# Altium PCB ESP32PCBc[1].PcbDoc (part 2 of 3)
Units mil, origin at the board's own origin, x right, y up, seen from the top; angles counter-clockwise.
Board outline 5118.11 x 3346.46 mil, 4 copper layers (L1, L2, L3, L4), stack 61.583 mil thick; 55 components, 53 nets, 223 pads, 182 vias.
Unrouted connection lines stored in the file: 1.
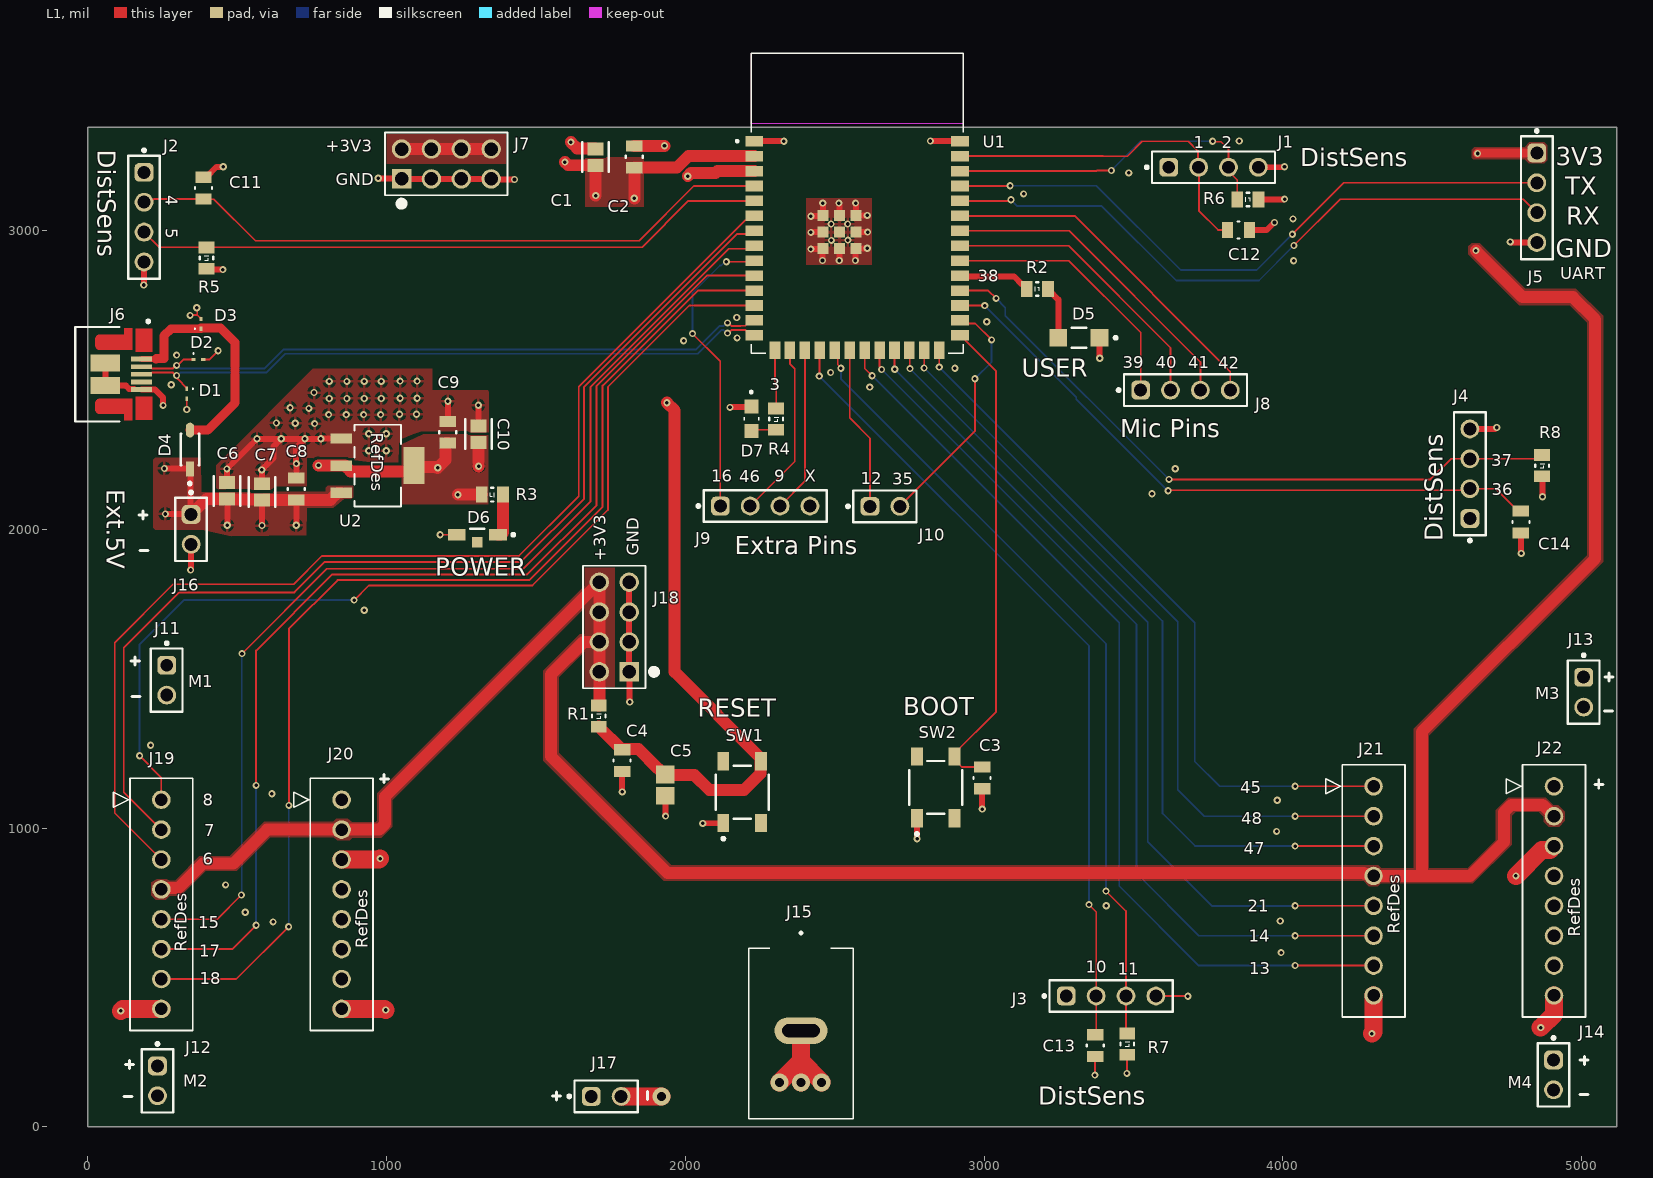
[diagram p0: L1 view]

## Part data (continued)
D4: library part 1N5819HW-7-F, "1N5819HW Series 40 V 1 A Surface Mount Schottky Barrier Rectifier - SOD-123", Average Rectified Current=1A, Case/Package=SOD-123-2, Forward Voltage=750mV, Manufacturer="Diodes Inc.", Max Forward Surge Current (Ifsm)=25A, Max Junction Temperature (Tj)=125°C, Max Power Dissipation=450mW, Max Repetitive Reverse Voltage (Vrrm)=40V, Min Operating Temperature=-65°C, Peak Reverse Current=1mA, Supplier Part Number=1N5819HW-FDIDKR-ND, Category="Schottky Diodes", China RoHS=Compliant, ComponentLink1Description=https://datasheet.octopart.com:443/1N5819HW-7-F-Diodes-Inc.-datasheet-180549196.pdf?src-supplier=IHS, ComponentLink1URL=https://datasheet.octopart.com:443/1N5819HW-7-F-Diodes-Inc.-datasheet-180549196.pdf?src-supplier=IHS, ComponentLink2Description=https://datasheet.octopart.com:443/1N5819HW-7-F-Diodes-Inc.-datasheet-8332965.pdf?src-supplier=Upverter, ComponentLink2URL=https://datasheet.octopart.com:443/1N5819HW-7-F-Diodes-Inc.-datasheet-8332965.pdf?src-supplier=Upverter, ComponentLink3Description=https://sigma.octopart.com:443/138895985/technical_drawing/Diodes-Inc.-1N5819HW-7-F.pdf?src-supplier=Upverter, ComponentLink3URL=https://sigma.octopart.com:443/138895985/technical_drawing/Diodes-Inc.-1N5819HW-7-F.pdf?src-supplier=Upverter, ComponentLink4Description=https://datasheet.octopart.com:443/1N5819HW-7-F-Diodes-Inc.-datasheet-134530231.pdf?src-supplier=Future+Electronics, ComponentLink4URL=https://datasheet.octopart.com:443/1N5819HW-7-F-Diodes-Inc.-datasheet-134530231.pdf?src-supplier=Future+Electronics, ComponentLink5Description=https://datasheet.octopart.com:443/1N5819HW-7-F-Diodes-Inc.-datasheet-34441420.pdf?src-supplier=Future+Electronics, ComponentLink5URL=https://datasheet.octopart.com:443/1N5819HW-7-F-Diodes-Inc.-datasheet-34441420.pdf?src-supplier=Future+Electronics, ComponentLink6Description=https://datasheet.octopart.com:443/1N5819HW-7-F-Diodes-Inc.-datasheet-10497210.pdf?src-supplier=Future+Electronics, ComponentLink6URL=https://datasheet.octopart.com:443/1N5819HW-7-F-Diodes-Inc.-datasheet-10497210.pdf?src-supplier=Future+Electronics, ComponentLink7Description=https://datasheet.octopart.com:443/1N5819HW-7-F-Diodes-Inc.-datasheet-169364014.pdf?src-supplier=Newark, ComponentLink7URL=https://datasheet.octopart.com:443/1N5819HW-7-F-Diodes-Inc.-datasheet-169364014.pdf?src-supplier=Newark, ComponentLink8Description=https://datasheet.octopart.com:443/1N5819HW-7-F-Diodes-Inc.-datasheet-78715396.pdf?src-supplier=Newark, ComponentLink8URL=https://datasheet.octopart.com:443/1N5819HW-7-F-Diodes-Inc.-datasheet-78715396.pdf?src-supplier=Newark, ComponentLink9Description=https://datasheet.octopart.com:443/1N5819HW-7-F-Diodes-Inc.-datasheet-14053419.pdf?src-supplier=iiiC, ComponentLink9URL=https://datasheet.octopart.com:443/1N5819HW-7-F-Diodes-Inc.-datasheet-14053419.pdf?src-supplier=iiiC, ComponentLink10Description=https://datasheet.octopart.com:443/1N5819HW-7-F-Diodes-Inc.-datasheet-7274306.pdf?src-supplier=Jameco, ComponentLink10URL=https://datasheet.octopart.com:443/1N5819HW-7-F-Diodes-Inc.-datasheet-7274306.pdf?src-supplier=Jameco, ComponentLink11Description=https://datasheet.octopart.com:443/1N5819HW-7-F-Diodes-Inc.-datasheet-16627.pdf?src-supplier=Mouser, ComponentLink11URL=https://datasheet.octopart.com:443/1N5819HW-7-F-Diodes-Inc.-datasheet-16627.pdf?src-supplier=Mouser, ComponentLink12Description=https://datasheet.octopart.com:443/1N5819HW-7-F-Diodes-Inc.-datasheet-145195.pdf?src-supplier=DigiKey, ComponentLink12URL=https://datasheet.octopart.com:443/1N5819HW-7-F-Diodes-Inc.-datasheet-145195.pdf?src-supplier=DigiKey, ComponentLink13Description=http://sigma.octopart.com:80/15616867/materials_sheet/Diodes-Inc.-1N5819HW-7-F.pdf?src-supplier=Compliance+Statements, ComponentLink13URL=http://sigma.octopart.com:80/15616867/materials_sheet/Diodes-Inc.-1N5819HW-7-F.pdf?src-supplier=Compliance+Statements, Contact Plating=Tin, Current Rating=1A, Element Configuration=Single, Forward Current=1A, Height=1.45mm, Lead Free="Lead Free", Length=2.85mm, Lifecycle Status=Production, Manufacturer Part Number=1N5819HW-7-F, Max Operating Temperature=125°C, Max Output current=1A, Max Reverse Voltage (DC)=40V, Min Breakdown Voltage=40V, Number of Elements=1, Number of Terminals=2, Output Current=1A, Packaging="Tape and Reel", Peak Non-Repetitive Surge Current=25A, Pins=2, Polarity=Standard, Pricing="1=0.29, 10=0.166, 100=0.1036, 500=0.07624, 1000=0.06736 (USD)", Radiation Hardening=No, REACH SVHC=Yes, Reverse Standoff Voltage=40V, Reverse Voltage=40V, RoHS=Compliant, Schedule B="8541100080, 8541100080|8541100080|8541100080|8541100080|8541100080", Stock=229353, Supplier=DigiKey, Termination=SMD/SMT, Voltage Rating (DC)=40V, Weight=10.007382mg, Width=1.7mm
D5: library part HSMS-C150, "LED Uni-Color Hi-Eff. Red 630nm 2-Pin Chip LED T/R / LED RED DIFFUSED 1206 SMD", Case Code (Imperial)=1206, Case Code (Metric)=3216, Color=Orange, Forward Current=25mA, Forward Voltage=2.6V, Illumination Color=Red, Lens Color="Clear, White", Manufacturer=Avago, Max Junction Temperature (Tj)=95°C, Max Operating Temperature=85°C, Min Operating Temperature=-40°C, Power Dissipation=65mW, Reverse Voltage=5V, Supplier Part Number=516-1440-1-ND, Test Current=20mA, Case/Package=1206, Category=LEDs, China RoHS=Compliant, ComponentLink1Description=https://datasheet.octopart.com:443/HSMS-C150-Broadcom-datasheet-11546876.pdf?src-supplier=Farnell, ComponentLink1URL=https://datasheet.octopart.com:443/HSMS-C150-Broadcom-datasheet-11546876.pdf?src-supplier=Farnell, ComponentLink2Description=https://datasheet.octopart.com:443/HSMS-C150.-Avago-datasheet-505973.pdf?src-supplier=Farnell, ComponentLink2URL=https://datasheet.octopart.com:443/HSMS-C150.-Avago-datasheet-505973.pdf?src-supplier=Farnell, ComponentLink3Description=https://datasheet.octopart.com:443/HSMS-C150.-Avago-datasheet-500352.pdf?src-supplier=Farnell, ComponentLink3URL=https://datasheet.octopart.com:443/HSMS-C150.-Avago-datasheet-500352.pdf?src-supplier=Farnell, ComponentLink4Description=https://datasheet.octopart.com:443/HSMS-C150-Broadcom-datasheet-179995514.pdf?src-supplier=IHS, ComponentLink4URL=https://datasheet.octopart.com:443/HSMS-C150-Broadcom-datasheet-179995514.pdf?src-supplier=IHS, ComponentLink5Description=https://datasheet.octopart.com:443/HSMS-C150-Avago-datasheet-10307877.pdf?src-supplier=Newark, ComponentLink5URL=https://datasheet.octopart.com:443/HSMS-C150-Avago-datasheet-10307877.pdf?src-supplier=Newark, ComponentLink6Description=https://datasheet.octopart.com:443/HSMS-C150-Avago-datasheet-14175028.pdf?src-supplier=iiiC, ComponentLink6URL=https://datasheet.octopart.com:443/HSMS-C150-Avago-datasheet-14175028.pdf?src-supplier=iiiC, ComponentLink7Description=https://datasheet.octopart.com:443/HSMS-C150-Avago-datasheet-7559354.pdf?src-supplier=Future+Electronics, ComponentLink7URL=https://datasheet.octopart.com:443/HSMS-C150-Avago-datasheet-7559354.pdf?src-supplier=Future+Electronics, ComponentLink8Description=https://datasheet.octopart.com:443/HSMS-C150-Avago-datasheet-7278276.pdf?src-supplier=Jameco, ComponentLink8URL=https://datasheet.octopart.com:443/HSMS-C150-Avago-datasheet-7278276.pdf?src-supplier=Jameco, ComponentLink9Description=https://datasheet.octopart.com:443/HSMS-C150-Avago-datasheet-9899724.pdf?src-supplier=RS+(Formerly+Allied+Electronics), ComponentLink9URL=https://datasheet.octopart.com:443/HSMS-C150-Avago-datasheet-9899724.pdf?src-supplier=RS+(Formerly+Allied+Electronics), ComponentLink10Description=https://datasheet.octopart.com:443/HSMS-C150-Avago-datasheet-8432.pdf?src-supplier=DigiKey, ComponentLink10URL=https://datasheet.octopart.com:443/HSMS-C150-Avago-datasheet-8432.pdf?src-supplier=DigiKey, Depth=1.6mm, Dominant Wavelength=626nm, Height=1.1mm, Lead Free="Lead Free", Length=3.2mm, Lens Style=Diffused, Lens Transparency=Diffused, Lifecycle Status=Production, Luminous Intensity=2.8mcd, Manufacturer Part Number=HSMS-C150, Mounting Technology="Surface Mount", Number of Circuits=1, Number of Elements=1, Number of LEDs=1, Number of Terminals=2, Packaging="Cut Tape", Peak Wavelength=630nm, Pins=2, Power Rating=65mW, Pricing="1=0.29, 10=0.201, 100=0.1412, 500=0.11414, 1000=0.10521 (USD)", Radiation Hardening=No, REACH SVHC=Yes, RoHS=Compliant, Schedule B=8541402000|8541402000|8541402000|8541402000|8541402000, Shape=Rectangular, Stock=85183, Supplier=DigiKey, Terminal Pitch=2.7mm, Viewing Angle=170°, Wavelength=626nm, Width=1.6mm
D6: library part HSMG-C110, "Surface Mount ChipLED Single Color LED, Green, Clear Untinted Nondiffused", Case/Package=SMD/SMT, Color=Green, Forward Current=25mA, Forward Voltage=2.6V, Lens Color="Clear, White", Manufacturer=Avago, Max Operating Temperature=85°C, Max Power Dissipation=78mW, Min Operating Temperature=-40°C, Power Rating=65mW, Reverse Voltage=5V, Supplier Part Number=516-1452-1-ND, Test Current=20mA, Voltage Rating (DC)=2.2V, Category=LEDs, China RoHS=Compliant, ComponentLink1Description=https://datasheet.octopart.com:443/HSMG-C110-Broadcom-datasheet-11546876.pdf?src-supplier=Avago, ComponentLink1URL=https://datasheet.octopart.com:443/HSMG-C110-Broadcom-datasheet-11546876.pdf?src-supplier=Avago, ComponentLink2Description=https://datasheet.octopart.com:443/HSMG-C110-Broadcom-datasheet-179995514.pdf?src-supplier=IHS, ComponentLink2URL=https://datasheet.octopart.com:443/HSMG-C110-Broadcom-datasheet-179995514.pdf?src-supplier=IHS, ComponentLink3Description=https://datasheet.octopart.com:443/HSMG-C110-Avago-datasheet-10307877.pdf?src-supplier=Newark, ComponentLink3URL=https://datasheet.octopart.com:443/HSMG-C110-Avago-datasheet-10307877.pdf?src-supplier=Newark, ComponentLink4Description=https://datasheet.octopart.com:443/HSMG-C110-Broadcom-datasheet-26698224.pdf?src-supplier=Newark, ComponentLink4URL=https://datasheet.octopart.com:443/HSMG-C110-Broadcom-datasheet-26698224.pdf?src-supplier=Newark, ComponentLink5Description=https://datasheet.octopart.com:443/HSMG-C110-Avago-datasheet-8329607.pdf?src-supplier=Future+Electronics, ComponentLink5URL=https://datasheet.octopart.com:443/HSMG-C110-Avago-datasheet-8329607.pdf?src-supplier=Future+Electronics, ComponentLink6Description=https://datasheet.octopart.com:443/HSMG-C110-Avago-datasheet-7834016.pdf?src-supplier=Jameco, ComponentLink6URL=https://datasheet.octopart.com:443/HSMG-C110-Avago-datasheet-7834016.pdf?src-supplier=Jameco, ComponentLink7Description=https://datasheet.octopart.com:443/HSMG-C110-Avago-datasheet-8432.pdf?src-supplier=DigiKey, ComponentLink7URL=https://datasheet.octopart.com:443/HSMG-C110-Avago-datasheet-8432.pdf?src-supplier=DigiKey, Contact Plating=Gold, Depth=1mm, Dominant Wavelength=572nm, Height=1mm, Illumination Color=Green, Lead Free="Lead Free", Length=3.2mm, Lens Style=Diffused, Lens Transparency=Diffused, Lifecycle Status=Production, Luminous Intensity=4.5mcd, Manufacturer Part Number=HSMG-C110, Mounting Technology="Surface Mount", Number of Circuits=1, Number of Elements=1, Number of LEDs=1, Number of Terminals=3, Packaging="Cut Tape", Peak Wavelength=570nm, Pins=2, Power Dissipation=78mW, Pricing="1=0.28, 10=0.194, 100=0.1365, 500=0.1102, 1000=0.10152 (USD)", Radiation Hardening=No, REACH SVHC=Yes, RoHS=Compliant, Schedule B=8541402000|8541402000|8541402000|8541402000|8541402000, Shape=Rectangular, Stock=2649, Supplier=DigiKey, Viewing Angle=130°, Wavelength=572nm, Width=1.5mm
D7: library part HSMY-C170, "LED YELLOW DIFFUSED CHIP SMD Yellow 586nm LED Indication - Discrete 2.1V 0805 (2012 Metric)", Case Code (Imperial)=0805, Case Code (Metric)=2012, Color=Yellow, Forward Current=20mA, Forward Voltage=2.6V, Lens Color="Clear, White", Manufacturer=Avago, Max Operating Temperature=85°C, Max Power Dissipation=52mW, Min Operating Temperature=-40°C, Reverse Voltage=5V, Supplier Part Number=516-1433-1-ND, Case/Package=0805, Category=LEDs, China RoHS=Compliant, ComponentLink1Description=https://datasheet.octopart.com:443/HSMY-C170-Broadcom-datasheet-11546876.pdf?src-supplier=Avago, ComponentLink1URL=https://datasheet.octopart.com:443/HSMY-C170-Broadcom-datasheet-11546876.pdf?src-supplier=Avago, ComponentLink2Description=https://datasheet.octopart.com:443/HSMY-C170-Broadcom-datasheet-179995514.pdf?src-supplier=IHS, ComponentLink2URL=https://datasheet.octopart.com:443/HSMY-C170-Broadcom-datasheet-179995514.pdf?src-supplier=IHS, ComponentLink3Description=https://datasheet.octopart.com:443/HSMY-C170-Avago-datasheet-10307877.pdf?src-supplier=Newark, ComponentLink3URL=https://datasheet.octopart.com:443/HSMY-C170-Avago-datasheet-10307877.pdf?src-supplier=Newark, ComponentLink4Description=https://datasheet.octopart.com:443/HSMY-C170-Broadcom-datasheet-26698234.pdf?src-supplier=Newark, ComponentLink4URL=https://datasheet.octopart.com:443/HSMY-C170-Broadcom-datasheet-26698234.pdf?src-supplier=Newark, ComponentLink5Description=https://datasheet.octopart.com:443/HSMY-C170-Avago-datasheet-7559354.pdf?src-supplier=element14+APAC, ComponentLink5URL=https://datasheet.octopart.com:443/HSMY-C170-Avago-datasheet-7559354.pdf?src-supplier=element14+APAC, ComponentLink6Description=https://datasheet.octopart.com:443/HSMY-C170-Avago-datasheet-8432.pdf?src-supplier=Farnell, ComponentLink6URL=https://datasheet.octopart.com:443/HSMY-C170-Avago-datasheet-8432.pdf?src-supplier=Farnell, ComponentLink7Description=https://datasheet.octopart.com:443/HSMY-C170-Avago-datasheet-10459301.pdf?src-supplier=Jameco, ComponentLink7URL=https://datasheet.octopart.com:443/HSMY-C170-Avago-datasheet-10459301.pdf?src-supplier=Jameco, Contact Plating=Gold, Depth=1.25mm, Dominant Wavelength=586nm, Height=800µm, Illumination Color=Yellow, Lead Free="Lead Free", Length=2mm, Lens Style=Diffused, Lens Transparency=Diffused, Lifecycle Status=Production, Luminous Intensity=2.8mcd, Manufacturer Part Number=HSMY-C170, Mounting Technology="Surface Mount", Number of Circuits=1, Number of Elements=1, Number of LEDs=1, Number of Terminals=2, Packaging="Cut Tape", Peak Wavelength=589nm, Pins=2, Power Dissipation=52mW, Power Rating=52mW, Pricing="1=0.3, 10=0.204, 100=0.1435, 500=0.1161, 1000=0.10704, 2000=0.09931 (USD)", Radiation Hardening=No, REACH SVHC=Yes, RoHS=Compliant, Schedule B=8541402000|8541402000|8541402000|8541402000|8541402000, Shape=Rectangular, Stock=56777, Supplier=DigiKey, Terminal Pitch=1.6mm, Test Current=20mA, Viewing Angle=170°, Wavelength=586nm, Width=1.25mm
J1 J2 J3 J4 J5 J8 J9: library part 61300411121, "Conn Unshrouded Header HDR 4 POS 2.54mm Solder ST Thru-Hole Bag", Color=Black, Contact Resistance=20mΩ, Current Rating=3A, Insulation Resistance=1GΩ, Manufacturer="Wurth Elektronik", Max Operating Temperature=105°C, Min Operating Temperature=-40°C, Operating Supply Voltage=250V, Supplier Part Number=732-5317-ND, Category="Headers and Wire Housings", ComponentLink1Description=https://datasheet.octopart.com:443/61300411121-W%C3%BCrth-Elektronik-datasheet-44382959.pdf?src-supplier=Future+Electronics, ComponentLink1URL=https://datasheet.octopart.com:443/61300411121-W%C3%BCrth-Elektronik-datasheet-44382959.pdf?src-supplier=Future+Electronics, ComponentLink2Description=https://datasheet.octopart.com:443/61300411121-Wurth-Elektronik-datasheet-169474491.pdf?src-supplier=Wurth+Elektronik, ComponentLink2URL=https://datasheet.octopart.com:443/61300411121-Wurth-Elektronik-datasheet-169474491.pdf?src-supplier=Wurth+Elektronik, ComponentLink3Description=https://datasheet.octopart.com:443/61300411121-W%C3%BCrth-Elektronik-datasheet-149524049.pdf?src-supplier=Farnell, ComponentLink3URL=https://datasheet.octopart.com:443/61300411121-W%C3%BCrth-Elektronik-datasheet-149524049.pdf?src-supplier=Farnell, ComponentLink4Description=https://datasheet.octopart.com:443/61300411121-W%C3%BCrth-Elektronik-datasheet-21154836.pdf?src-supplier=element14+APAC, ComponentLink4URL=https://datasheet.octopart.com:443/61300411121-W%C3%BCrth-Elektronik-datasheet-21154836.pdf?src-supplier=element14+APAC, Connector Type="Male Pin", Contact Material=Gold, Contact Mating Length=5.9944mm, Contact Plating=Gold, Gender=Male, Height=8.89mm, Lead Free="Lead Free", Lead Pitch=2.54mm, Length=10.16mm, Manufacturer Part Number=61300411121, Mounting Technology="Through Hole", Number of Contacts=4, Number of Positions=4, Number of Rows=1, Orientation=Vertical, Packaging=Bulk, Pins=4, Pitch=2.54mm, Pricing="1=0.17, 10=0.147, 25=0.1216, 50=0.1018, 100=0.0918, 1000=0.085 (USD)", RoHS=Compliant, Stock=56227, Supplier=DigiKey, Termination=Solder, Voltage Rating=250V
J6: library part 10103594-0001LF, "Usb Connector, 5 Contact(S), Female, Right Angle, Surface Mount Terminal, Locking, Receptacle", Color=Black, Contact Resistance=10mΩ, Current Rating=1.8A, Dielectric Material=Polyethylene, Insulation Resistance=100MΩ, Manufacturer="Amphenol Communications Solutions", Max Operating Temperature=85°C, Max Voltage Rating (AC)=100V, Min Operating Temperature=-55°C, Supplier Part Number=609-4050-1-ND, Category="USB Connectors", China RoHS=Compliant, ComponentLink1Description=https://datasheet.octopart.com:443/10103594-0001LF-Amphenol-Communications-Solutions-datasheet-11971448.pdf?src-supplier=Electro+Sonic, ComponentLink1URL=https://datasheet.octopart.com:443/10103594-0001LF-Amphenol-Communications-Solutions-datasheet-11971448.pdf?src-supplier=Electro+Sonic, ComponentLink2Description=https://datasheet.octopart.com:443/10103594-0001LF-Amphenol-Communications-Solutions-datasheet-10887844.pdf?src-supplier=TME, ComponentLink2URL=https://datasheet.octopart.com:443/10103594-0001LF-Amphenol-Communications-Solutions-datasheet-10887844.pdf?src-supplier=TME, ComponentLink3Description=https://datasheet.octopart.com:443/10103594-0001LF-Amphenol-Communications-Solutions-datasheet-96019471.pdf?src-supplier=Amphenol+ICC+%2f+FCI, ComponentLink3URL=https://datasheet.octopart.com:443/10103594-0001LF-Amphenol-Communications-Solutions-datasheet-96019471.pdf?src-supplier=Amphenol+ICC+%2f+FCI, ComponentLink4Description=https://datasheet.octopart.com:443/10103594-0001LF-Amphenol-Communications-Solutions-datasheet-13449752.pdf?src-supplier=RS+(Formerly+Allied+Electronics), ComponentLink4URL=https://datasheet.octopart.com:443/10103594-0001LF-Amphenol-Communications-Solutions-datasheet-13449752.pdf?src-supplier=RS+(Formerly+Allied+Electronics), Connector Type="Receptacle, USB", Contact Gender=Female, Contact Material="Gold, Nickel", Contact Plating=Gold, Features=Shielded, Gender=Receptacle, Height=3.05mm, Housing Material=Thermoplastic, Lead Free="Lead Free", Length=8.04mm, Lifecycle Status=Production, Manufacturer Part Number=10103594-0001LF, Mounting Technology="Horizontal, Surface Mount", Number of Contacts=5, Number of Ports=1, Number of Rows=1, Number of Terminals=5, Orientation="Right Angle", Pins=5, Pitch=650µm, Plating Thickness=762nm, Pricing="1=0.75, 10=0.636, 25=0.5956, 50=0.5672, 100=0.5401, 250=0.50628, 500=0.48208 (USD)", Radiation Hardening=No, REACH SVHC=Yes, RoHS=Compliant, Shell Finish=Tin, Shell Material="Stainless Steel", Stock=38409, Supplier=DigiKey, Terminal Pitch=650µm, Termination=Solder, USB Standard="USB 2.0", Voltage Rating=100V
J7 J18: library part TSW-104-07-F-D, "Pin Header, Board-to-Board, 2.54 mm, 2 Rows, 8 Contacts, Through Hole, TSW Series", Color=Black, Manufacturer=Samtec, Manufacturer Lifecycle Status=PRODUCTION, Max Current Rating=7.6A, Max Operating Temperature=125°C, Max Voltage Rating (AC)=550V, Min Operating Temperature=-55°C, Supplier Part Number=SAM8996-ND, Category="Headers and Wire Housings", ComponentLink1Description=https://datasheet.octopart.com:443/TSW-104-07-F-D-Samtec-datasheet-97325576.pdf?src-supplier=Sager+Electronics, ComponentLink1URL=https://datasheet.octopart.com:443/TSW-104-07-F-D-Samtec-datasheet-97325576.pdf?src-supplier=Sager+Electronics, ComponentLink2Description=https://datasheet.octopart.com:443/TSW-104-07-F-D-Samtec-datasheet-151455181.pdf?src-supplier=Sager+Electronics, ComponentLink2URL=https://datasheet.octopart.com:443/TSW-104-07-F-D-Samtec-datasheet-151455181.pdf?src-supplier=Sager+Electronics, ComponentLink3Description=https://sigma.octopart.com:443/97325577/technical_drawing/Samtec-TSW-104-07-F-D.pdf?src-supplier=Samtec, ComponentLink3URL=https://sigma.octopart.com:443/97325577/technical_drawing/Samtec-TSW-104-07-F-D.pdf?src-supplier=Samtec, ComponentLink4Description=https://datasheet.octopart.com:443/TSW-104-07-F-D-Samtec-datasheet-136646178.pdf?src-supplier=Master+Electronics, ComponentLink4URL=https://datasheet.octopart.com:443/TSW-104-07-F-D-Samtec-datasheet-136646178.pdf?src-supplier=Master+Electronics, ComponentLink5Description=https://datasheet.octopart.com:443/TSW-104-07-F-D-Samtec-datasheet-182948906.pdf?src-supplier=JRH+Electronics, ComponentLink5URL=https://datasheet.octopart.com:443/TSW-104-07-F-D-Samtec-datasheet-182948906.pdf?src-supplier=JRH+Electronics, ComponentLink6Description=https://datasheet.octopart.com:443/TSW-104-07-F-D-Samtec-datasheet-160657603.pdf?src-supplier=Toby+Electronics, ComponentLink6URL=https://datasheet.octopart.com:443/TSW-104-07-F-D-Samtec-datasheet-160657603.pdf?src-supplier=Toby+Electronics, ComponentLink7Description=https://datasheet.octopart.com:443/TSW-104-07-F-D-Samtec-datasheet-116539033.pdf?src-supplier=Toby+Electronics, ComponentLink7URL=https://datasheet.octopart.com:443/TSW-104-07-F-D-Samtec-datasheet-116539033.pdf?src-supplier=Toby+Electronics, ComponentLink8Description=https://datasheet.octopart.com:443/TSW-104-07-F-D-Samtec-datasheet-116536310.pdf?src-supplier=Toby+Electronics, ComponentLink8URL=https://datasheet.octopart.com:443/TSW-104-07-F-D-Samtec-datasheet-116536310.pdf?src-supplier=Toby+Electronics, ComponentLink9Description=https://datasheet.octopart.com:443/TSW-104-07-F-D-Samtec-datasheet-116615235.pdf?src-supplier=Electro+Sonic, ComponentLink9URL=https://datasheet.octopart.com:443/TSW-104-07-F-D-Samtec-datasheet-116615235.pdf?src-supplier=Electro+Sonic, ComponentLink10Description=https://datasheet.octopart.com/TSW-104-07-F-D-Samtec-datasheet-86818365.pdf, ComponentLink10URL=https://datasheet.octopart.com/TSW-104-07-F-D-Samtec-datasheet-86818365.pdf, ComponentLink11Description=https://datasheet.octopart.com:443/TSW-104-07-F-D-Samtec-datasheet-62107121.pdf?src-supplier=Newark, ComponentLink11URL=https://datasheet.octopart.com:443/TSW-104-07-F-D-Samtec-datasheet-62107121.pdf?src-supplier=Newark, ComponentLink12Description=https://datasheet.octopart.com:443/TSW-104-07-F-D-Samtec-datasheet-11047283.pdf?src-supplier=Newark, ComponentLink12URL=https://datasheet.octopart.com:443/TSW-104-07-F-D-Samtec-datasheet-11047283.pdf?src-supplier=Newark, Connector Type="Male Pin", Contact Material=Bronze, Contact Mating Length=5.842mm, Contact Plating=Gold, Depth=5.08mm, Gender=Male, Housing Color=Black, Housing Material=Polyester, Lead Pitch=2.54mm, Length=10.16mm, Lifecycle Status=Production, Manufacturer Part Number=TSW-104-07-F-D, Mounting Technology="Through Hole", Number of Contacts=8, Number of Positions=8, Number of Rows=2, Orientation=Straight, Pitch=2.54mm, Pricing="1=0.43, 50=0.37, 100=0.31, 500=0.26, 1000=0.22, 2000=0.19, 5000=0.17, 10000=0.15 (USD)", Radiation Hardening=No, REACH SVHC=No, RoHS=Compliant, Row Spacing=2.54mm, Stock=20158, Supplier=DigiKey, Termination=Solder
J10 J11 J12 J13 J14 J16 J17: library part 61300211121, "WR-PHD Straight Male, PCB Header, Through Hole, 1 Rows, 2 Contacts, 2.54mm Pitch", Color=Black, Contact Resistance=20mΩ, Current Rating=3A, Insulation Resistance=1GΩ, Manufacturer="Wurth Elektronik", Max Operating Temperature=105°C, Min Operating Temperature=-40°C, Operating Supply Voltage=250V, Supplier Part Number=732-5315-ND, Category="Headers and Wire Housings", ComponentLink1Description=https://datasheet.octopart.com:443/61300211121-Wurth-Elektronik-datasheet-168684095.pdf?src-supplier=Wurth+Elektronik, ComponentLink1URL=https://datasheet.octopart.com:443/61300211121-Wurth-Elektronik-datasheet-168684095.pdf?src-supplier=Wurth+Elektronik, ComponentLink2Description=https://datasheet.octopart.com:443/61300211121-W%C3%BCrth-Elektronik-datasheet-44382959.pdf?src-supplier=Future+Electronics, ComponentLink2URL=https://datasheet.octopart.com:443/61300211121-W%C3%BCrth-Elektronik-datasheet-44382959.pdf?src-supplier=Future+Electronics, ComponentLink3Description=https://datasheet.octopart.com:443/61300211121-W%C3%BCrth-Elektronik-datasheet-149524045.pdf?src-supplier=Farnell, ComponentLink3URL=https://datasheet.octopart.com:443/61300211121-W%C3%BCrth-Elektronik-datasheet-149524045.pdf?src-supplier=Farnell, ComponentLink4Description=https://datasheet.octopart.com:443/61300211121-W%C3%BCrth-Elektronik-datasheet-21154836.pdf?src-supplier=element14+APAC, ComponentLink4URL=https://datasheet.octopart.com:443/61300211121-W%C3%BCrth-Elektronik-datasheet-21154836.pdf?src-supplier=element14+APAC, Connector Type="Male Pin", Contact Gender=Male, Contact Material=Gold, Contact Mating Length=5.9944mm, Contact Plating=Gold, Gender=Male, Height=8.94mm, Housing Material=PBT, Lead Free="Lead Free", Lead Pitch=2.54mm, Length=5.08mm, Manufacturer Part Number=61300211121, Mounting Technology="Through Hole", Number of Contacts=2, Number of Positions=2, Number of Rows=1, Orientation=Vertical, Packaging=Bulk, Pins=2, Pitch=2.54mm, Pricing="1=0.12, 10=0.102, 25=0.0848, 50=0.0712, 100=0.0639, 1000=0.06 (USD)", REACH SVHC=No, RoHS=Compliant, Stock=193921, Supplier=DigiKey, Termination="Through Hole", Voltage Rating=250V
J15: library part PJ-037B, "2.5 x 6.5 mm, 2.5 A, Horizontal, Through Hole, Dc Power Jack Connector", Current Rating=2.5A, Manufacturer="Same Sky", Supplier Part Number=CP-037B-ND, Voltage Rating=24V, Category="Power Connectors", ComponentLink1Description=https://datasheet.octopart.com:443/PJ-037B-Same-Sky-datasheet-188828269.pdf?src-supplier=Same+Sky, ComponentLink1URL=https://datasheet.octopart.com:443/PJ-037B-Same-Sky-datasheet-188828269.pdf?src-supplier=Same+Sky, ComponentLink2Description=https://datasheet.octopart.com:443/PJ-037B-Same-Sky-datasheet-181917287.pdf?src-supplier=Same+Sky, ComponentLink2URL=https://datasheet.octopart.com:443/PJ-037B-Same-Sky-datasheet-181917287.pdf?src-supplier=Same+Sky, ComponentLink3Description=https://datasheet.octopart.com:443/PJ-037B-Same-Sky-datasheet-181917286.pdf?src-supplier=Same+Sky, ComponentLink3URL=https://datasheet.octopart.com:443/PJ-037B-Same-Sky-datasheet-181917286.pdf?src-supplier=Same+Sky, ComponentLink4Description=https://datasheet.octopart.com:443/PJ-037B-CUI-Devices-datasheet-175924779.pdf?src-supplier=Same+Sky, ComponentLink4URL=https://datasheet.octopart.com:443/PJ-037B-CUI-Devices-datasheet-175924779.pdf?src-supplier=Same+Sky, ComponentLink5Description=https://datasheet.octopart.com:443/PJ-037B-CUI-Devices-datasheet-137941219.pdf?src-supplier=Same+Sky, ComponentLink5URL=https://datasheet.octopart.com:443/PJ-037B-CUI-Devices-datasheet-137941219.pdf?src-supplier=Same+Sky, ComponentLink6Description=https://datasheet.octopart.com:443/PJ-037B-CUI-Devices-datasheet-180437400.pdf?src-supplier=IHS, ComponentLink6URL=https://datasheet.octopart.com:443/PJ-037B-CUI-Devices-datasheet-180437400.pdf?src-supplier=IHS, ComponentLink7Description=https://datasheet.octopart.com:443/PJ-037B-Same-Sky-datasheet-182880908.pdf?src-supplier=Electro+Sonic, ComponentLink7URL=https://datasheet.octopart.com:443/PJ-037B-Same-Sky-datasheet-182880908.pdf?src-supplier=Electro+Sonic, ComponentLink8Description=https://datasheet.octopart.com:443/PJ-037B-CUI-Devices-datasheet-175925580.pdf?src-supplier=Master+Electronics, ComponentLink8URL=https://datasheet.octopart.com:443/PJ-037B-CUI-Devices-datasheet-175925580.pdf?src-supplier=Master+Electronics, ComponentLink9Description=https://datasheet.octopart.com:443/PJ-037B-CUI-Devices-datasheet-141000227.pdf?src-supplier=Master+Electronics, ComponentLink9URL=https://datasheet.octopart.com:443/PJ-037B-CUI-Devices-datasheet-141000227.pdf?src-supplier=Master+Electronics, ComponentLink10Description=https://datasheet.octopart.com:443/PJ-037B-CUI-Devices-datasheet-103110664.pdf?src-supplier=Master+Electronics, ComponentLink10URL=https://datasheet.octopart.com:443/PJ-037B-CUI-Devices-datasheet-103110664.pdf?src-supplier=Master+Electronics, ComponentLink11Description=https://datasheet.octopart.com:443/PJ-037B-Same-Sky-datasheet-189105172.pdf?src-supplier=Master+Electronics, ComponentLink11URL=https://datasheet.octopart.com:443/PJ-037B-Same-Sky-datasheet-189105172.pdf?src-supplier=Master+Electronics, ComponentLink12Description=https://datasheet.octopart.com:443/PJ-037B-Same-Sky-datasheet-182049853.pdf?src-supplier=Future+Electronics, ComponentLink12URL=https://datasheet.octopart.com:443/PJ-037B-Same-Sky-datasheet-182049853.pdf?src-supplier=Future+Electronics, ComponentLink13Description=https://datasheet.octopart.com:443/PJ-037B-CUI-Devices-datasheet-175923562.pdf?src-supplier=Future+Electronics, ComponentLink13URL=https://datasheet.octopart.com:443/PJ-037B-CUI-Devices-datasheet-175923562.pdf?src-supplier=Future+Electronics, ComponentLink14Description=https://datasheet.octopart.com:443/PJ-037B-CUI-Devices-datasheet-137760685.pdf?src-supplier=Future+Electronics, ComponentLink14URL=https://datasheet.octopart.com:443/PJ-037B-CUI-Devices-datasheet-137760685.pdf?src-supplier=Future+Electronics, ComponentLink15Description=https://datasheet.octopart.com:443/PJ-037B-CUI-Devices-datasheet-175927596.pdf?src-supplier=CUI+Devices+SCT, ComponentLink15URL=https://datasheet.octopart.com:443/PJ-037B-CUI-Devices-datasheet-175927596.pdf?src-supplier=CUI+Devices+SCT, ComponentLink16Description=https://datasheet.octopart.com:443/PJ-037B-CUI-Devices-datasheet-142370758.pdf?src-supplier=CUI+Devices+SCT, ComponentLink16URL=https://datasheet.octopart.com:443/PJ-037B-CUI-Devices-datasheet-142370758.pdf?src-supplier=CUI+Devices+SCT, ComponentLink17Description=https://octopart.com:443/opatz8j6/c1?t=ugIBICy-aquGENpJ5UVE1kONiWm4Jmye08y8HK-0dHugvEvDShjkU2vkALkg81eMeYqXvZhRpG0R8tPN40EocjuskCAh7XxVN8JS1a7nX6yDn71JifNfY55yLydMfUID1IxMe-aG7_idBqI2aybvW_B1_vyNQqKRAl91P9Ny1aLJlgl7jdVw_pwtRfT4Ujqw-bsi_OwdGpNYzqY4SWKQwVW7yzOyktRHaazl5dbIhoFUwRdxDdlgsrKZx7IYVSzXwdqlLXdu6s_3ABRwIRLewOWFjmWEjHc_DG0qkv0PjiuITWn6CbdvXjGiMH0odnPZUlRjUK2KM54VuGAzqWG-d-5NxI2_5YZNMA&src-supplier=Compliance+Statements, ComponentLink17URL=https://octopart.com:443/opatz8j6/c1?t=ugIBICy-aquGENpJ5UVE1kONiWm4Jmye08y8HK-0dHugvEvDShjkU2vkALkg81eMeYqXvZhRpG0R8tPN40EocjuskCAh7XxVN8JS1a7nX6yDn71JifNfY55yLydMfUID1IxMe-aG7_idBqI2aybvW_B1_vyNQqKRAl91P9Ny1aLJlgl7jdVw_pwtRfT4Ujqw-bsi_OwdGpNYzqY4SWKQwVW7yzOyktRHaazl5dbIhoFUwRdxDdlgsrKZx7IYVSzXwdqlLXdu6s_3ABRwIRLewOWFjmWEjHc_DG0qkv0PjiuITWn6CbdvXjGiMH0odnPZUlRjUK2KM54VuGAzqWG-d-5NxI2_5YZNMA&src-supplier=Compliance+Statements, ComponentLink18Description=https://octopart.com:443/opatz8j6/c1?t=xY83QJYeMgOnbRCoY0MJZ0kIo5YAXWIf_KfjZSMQzpzyrl-9JxtFTr69jnymLJkbjzK7Lh6EscJK24nUCwiICczRq7NMp0xGoLCpTn4gxZ7zYxKXZakIj_zjT2uutoWIv4bSHRlvdWmCCDEJby7LfgMYru2nGKwlO6BQJX4zEfs7hC0wK24gbVPjc3w0Y3STzCc5vE401SZFfM-fhIhrbaea6tBhZCBd9UTpy56_2aftF9KpGkqVHM1PWBKk6XRT528tR6sLSTUs4PvC1IA-VCaeEn6UjqcO_AYW1W_1CbF2_ohw-l0h8owecFjxbO9CCibDaBOKVsGDoWbcOMeCxhnLSnLp&src-supplier=Compliance+Statements, ComponentLink18URL=https://octopart.com:443/opatz8j6/c1?t=xY83QJYeMgOnbRCoY0MJZ0kIo5YAXWIf_KfjZSMQzpzyrl-9JxtFTr69jnymLJkbjzK7Lh6EscJK24nUCwiICczRq7NMp0xGoLCpTn4gxZ7zYxKXZakIj_zjT2uutoWIv4bSHRlvdWmCCDEJby7LfgMYru2nGKwlO6BQJX4zEfs7hC0wK24gbVPjc3w0Y3STzCc5vE401SZFfM-fhIhrbaea6tBhZCBd9UTpy56_2aftF9KpGkqVHM1PWBKk6XRT528tR6sLSTUs4PvC1IA-VCaeEn6UjqcO_AYW1W_1CbF2_ohw-l0h8owecFjxbO9CCibDaBOKVsGDoWbcOMeCxhnLSnLp&src-supplier=Compliance+Statements, ComponentLink19Description=https://octopart.com:443/opatz8j6/c1?t=FzGMKkhviOWT8PLmgXVIsGD7OC-ZKcDZSdb9rjzUd-4CdYnadLpmQ77JdXOitmMu4wWORmNPfxYZ17cA6TaEO6Mm1ZgdO8lXcwXJppTA043W0gQ2P4U-7E6ujoGSvuNzQJMAYjSV5q33INZyelMHWI8ENsIoBunWKjTSudwCbgSa82zECeXZpdhIyaUBolyjB6K4eLrM_w-l1dTNFW2JX6bvmSbC1AwvuqFFcPMpPK-A1MOExm4S1J8WQqkV9WeO-mmR1e_4r-vTZ2n8Sy88Wsu_EYkFLu4NtxQoLu7MVh6vC8N1AZg7LWiCGS2Ok64pLyM3awZnEG6CfUT4hTLqw-HWZb4BW3AwSw&src-supplier=Compliance+Statements, ComponentLink19URL=https://octopart.com:443/opatz8j6/c1?t=FzGMKkhviOWT8PLmgXVIsGD7OC-ZKcDZSdb9rjzUd-4CdYnadLpmQ77JdXOitmMu4wWORmNPfxYZ17cA6TaEO6Mm1ZgdO8lXcwXJppTA043W0gQ2P4U-7E6ujoGSvuNzQJMAYjSV5q33INZyelMHWI8ENsIoBunWKjTSudwCbgSa82zECeXZpdhIyaUBolyjB6K4eLrM_w-l1dTNFW2JX6bvmSbC1AwvuqFFcPMpPK-A1MOExm4S1J8WQqkV9WeO-mmR1e_4r-vTZ2n8Sy88Wsu_EYkFLu4NtxQoLu7MVh6vC8N1AZg7LWiCGS2Ok64pLyM3awZnEG6CfUT4hTLqw-HWZb4BW3AwSw&src-supplier=Compliance+Statements, ComponentLink20Description=https://octopart.com:443/opatz8j6/c1?t=yyvtSRofrppp-5KrzO7cVDg_UkI1Q6UEwrOzVOQOIp0n2wkAoZ4RrB1A8L3Fx-rNVFbAG4w0SpWUnSE2EYvc_xCoNcFsz4mWjRDYbK7qXyFxie6BJuhhldDhR2CTLFpcPNAGUkq5xMGzJTFkzHUG2Xp4Owqs3EwllU3_e3OsiGRn8D0IJRAOELGfXrDY2XigBaSyPkyUIYCXsKazcIG_RxmnY6Umsst-42oAFgQzEcY0KbnV4ZcHR8-zLKv--FJ4Mts6nsXDR5OGkd2fB0oceMNf2TFHBMNUzSQjnwujgTz6-O4srKLl763V3rMq7gnR7z5AAFxOnZINBCQgGlAyc9xKVT2w&src-supplier=Compliance+Statements, ComponentLink20URL=https://octopart.com:443/opatz8j6/c1?t=yyvtSRofrppp-5KrzO7cVDg_UkI1Q6UEwrOzVOQOIp0n2wkAoZ4RrB1A8L3Fx-rNVFbAG4w0SpWUnSE2EYvc_xCoNcFsz4mWjRDYbK7qXyFxie6BJuhhldDhR2CTLFpcPNAGUkq5xMGzJTFkzHUG2Xp4Owqs3EwllU3_e3OsiGRn8D0IJRAOELGfXrDY2XigBaSyPkyUIYCXsKazcIG_RxmnY6Umsst-42oAFgQzEcY0KbnV4ZcHR8-zLKv--FJ4Mts6nsXDR5OGkd2fB0oceMNf2TFHBMNUzSQjnwujgTz6-O4srKLl763V3rMq7gnR7z5AAFxOnZINBCQgGlAyc9xKVT2w&src-supplier=Compliance+Statements, Contact Material=Brass, Contact Plating=Tin, Inside Diameter=2.5mm, Lifecycle Status=Production, Manufacturer Part Number=PJ-037B, Mounting Technology="Through Hole", Number of Conductors=2, Outside Diameter=6.5mm, Pricing="1=0.51, 10=0.431, 25=0.4044, 50=0.385, 100=0.3665, 250=0.34352, 500=0.3271, 1000=0.31147, 2500=0.29196 (USD)", REACH SVHC=Yes, RoHS=Compliant, Schedule B="8536695050, 8536695050|8536695050, 8536695050|8536695050|8536695050, 8536695050|8536695050|8536695050|8536695050", Shielding=No, Stock=35819, Supplier=DigiKey, Voltage Rating (DC)=24V
J19 J20 J21 J22: library part PPTC081LFBN-RC, "Female, 8C, Straight, .100\"CC; 3.20mm Tail, No Mt. 100u\" Tin; PBT, Phos Bronze, 105 C", Color=Black, Current Rating=3A, Dielectric Material=Polyester, Manufacturer=Sullins, Max Operating Temperature=105°C, Min Operating Temperature=-40°C, Supplier Part Number=S7006-ND, Category="Card Edge Connectors", ComponentLink1Description=https://datasheet.octopart.com:443/PPTC081LFBN-RC-Sullins-datasheet-138810743.pdf?src-supplier=IHS, ComponentLink1URL=https://datasheet.octopart.com:443/PPTC081LFBN-RC-Sullins-datasheet-138810743.pdf?src-supplier=IHS, ComponentLink2Description=https://datasheet.octopart.com:443/PPTC081LFBN-RC-Sullins-datasheet-47864048.pdf?src-supplier=Upverter, ComponentLink2URL=https://datasheet.octopart.com:443/PPTC081LFBN-RC-Sullins-datasheet-47864048.pdf?src-supplier=Upverter, ComponentLink3Description=https://datasheet.octopart.com:443/PPTC081LFBN-RC-Sullins-datasheet-41308905.pdf?src-supplier=Future+Electronics, ComponentLink3URL=https://datasheet.octopart.com:443/PPTC081LFBN-RC-Sullins-datasheet-41308905.pdf?src-supplier=Future+Electronics, ComponentLink4Description=https://datasheet.octopart.com:443/PPTC081LFBN-RC-Sullins-datasheet-12511165.pdf?src-supplier=Future+Electronics, ComponentLink4URL=https://datasheet.octopart.com:443/PPTC081LFBN-RC-Sullins-datasheet-12511165.pdf?src-supplier=Future+Electronics, Connector Type="Header, Socket", Contact Gender=Female, Contact Material=Bronze, Contact Plating=Tin, Height=8.5mm, Housing Material=Plastic, Lead Free="Lead Free", Length=20.8mm, Lifecycle Status=Production, Manufacturer Part Number=PPTC081LFBN-RC, Mounting Technology="Through Hole", Number of Positions=8, Number of Rows=1, Packaging=Bulk, Pins=8, Pitch=2.54mm, Plating Thickness=2.54µm, Pricing="1=0.51, 10=0.435, 400=0.33535, 800=0.31933, 1200=0.31031, 5200=0.2798, 10000=0.26719 (USD)", REACH SVHC=Yes, RoHS=Compliant, Stock=36413, Supplier=DigiKey, Terminal Pitch=2.54mm, Termination=Solder, Width=2.5mm
R1 R5 R6 R7 R8: library part RC0805FR-0710KL, "Res Thick Film 0805 10K Ohm 1% 0.125W(1/8W) +/-100ppm/C Epoxy Pad SMD T/R", Case Code (Imperial)=0805, Manufacturer="Yageo Group", Max Operating Temperature=155°C, Max Power Dissipation=125mW, Min Operating Temperature=-55°C, Supplier Part Number=311-10.0KCRDKR-ND, Temperature Coefficient=100ppm/°C, Tolerance=1%, Voltage Rating=150V, Case/Package=0805, Category="Chip SMD Resistors", China RoHS=Non-Compliant, ComponentLink1Description=https://datasheet.octopart.com:443/RC0805FR-0710KL-Yageo-datasheet-175887523.pdf?src-supplier=Newark, ComponentLink1URL=https://datasheet.octopart.com:443/RC0805FR-0710KL-Yageo-datasheet-175887523.pdf?src-supplier=Newark, ComponentLink2Description=https://datasheet.octopart.com:443/RC0805FR-0710KL-Yageo-datasheet-62067350.pdf?src-supplier=Farnell, ComponentLink2URL=https://datasheet.octopart.com:443/RC0805FR-0710KL-Yageo-datasheet-62067350.pdf?src-supplier=Farnell, ComponentLink3Description=https://datasheet.octopart.com:443/RC0805FR-0710KL-Yageo-datasheet-13691069.pdf?src-supplier=Farnell, ComponentLink3URL=https://datasheet.octopart.com:443/RC0805FR-0710KL-Yageo-datasheet-13691069.pdf?src-supplier=Farnell, ComponentLink4Description=https://datasheet.octopart.com:443/RC0805FR-0710KL-Yageo-datasheet-103092701.pdf?src-supplier=Upverter, ComponentLink4URL=https://datasheet.octopart.com:443/RC0805FR-0710KL-Yageo-datasheet-103092701.pdf?src-supplier=Upverter, ComponentLink5Description=https://datasheet.octopart.com:443/RC0805FR-0710KL-Yageo-datasheet-98239111.pdf?src-supplier=Upverter, ComponentLink5URL=https://datasheet.octopart.com:443/RC0805FR-0710KL-Yageo-datasheet-98239111.pdf?src-supplier=Upverter, ComponentLink6Description=https://datasheet.octopart.com:443/RC0805FR-0710KL-Yageo---Phycomp-datasheet-67302840.pdf?src-supplier=Upverter, ComponentLink6URL=https://datasheet.octopart.com:443/RC0805FR-0710KL-Yageo---Phycomp-datasheet-67302840.pdf?src-supplier=Upverter, ComponentLink7Description=https://datasheet.octopart.com:443/RC0805FR-0710KL-Yageo-datasheet-8330313.pdf?src-supplier=element14+APAC, ComponentLink7URL=https://datasheet.octopart.com:443/RC0805FR-0710KL-Yageo-datasheet-8330313.pdf?src-supplier=element14+APAC, ComponentLink8Description=https://datasheet.octopart.com:443/RC0805FR-0710KL-Yageo-datasheet-12592811.pdf?src-supplier=element14+APAC, ComponentLink8URL=https://datasheet.octopart.com:443/RC0805FR-0710KL-Yageo-datasheet-12592811.pdf?src-supplier=element14+APAC, ComponentLink9Description=https://datasheet.octopart.com:443/RC0805FR-0710KL-Yageo-Group-datasheet-190305687.pdf?src-supplier=Future+Electronics, ComponentLink9URL=https://datasheet.octopart.com:443/RC0805FR-0710KL-Yageo-Group-datasheet-190305687.pdf?src-supplier=Future+Electronics, ComponentLink10Description=https://datasheet.octopart.com:443/RC0805FR-0710KL-Yageo-datasheet-164759695.pdf?src-supplier=Future+Electronics, ComponentLink10URL=https://datasheet.octopart.com:443/RC0805FR-0710KL-Yageo-datasheet-164759695.pdf?src-supplier=Future+Electronics, ComponentLink11Description=https://datasheet.octopart.com:443/RC0805FR-0710KL-Yageo-datasheet-15800360.pdf?src-supplier=Future+Electronics, ComponentLink11URL=https://datasheet.octopart.com:443/RC0805FR-0710KL-Yageo-datasheet-15800360.pdf?src-supplier=Future+Electronics, ComponentLink12Description=https://datasheet.octopart.com:443/RC0805FR-0710KL-Yageo-datasheet-8324252.pdf?src-supplier=Future+Electronics, ComponentLink12URL=https://datasheet.octopart.com:443/RC0805FR-0710KL-Yageo-datasheet-8324252.pdf?src-supplier=Future+Electronics, ComponentLink13Description=https://datasheet.octopart.com:443/RC0805FR-0710KL-Yageo-datasheet-79472498.pdf?src-supplier=Megastar, ComponentLink13URL=https://datasheet.octopart.com:443/RC0805FR-0710KL-Yageo-datasheet-79472498.pdf?src-supplier=Megastar, ComponentLink14Description=https://datasheet.octopart.com:443/RC0805FR-0710KL-Yageo-datasheet-27714392.pdf?src-supplier=Seeed+Studio, ComponentLink14URL=https://datasheet.octopart.com:443/RC0805FR-0710KL-Yageo-datasheet-27714392.pdf?src-supplier=Seeed+Studio, ComponentLink15Description=https://datasheet.octopart.com/RC0805FR-0710KL-Yageo-datasheet-73766026.pdf, ComponentLink15URL=https://datasheet.octopart.com/RC0805FR-0710KL-Yageo-datasheet-73766026.pdf, ComponentLink16Description=https://datasheet.octopart.com:443/RC0805FR-0710KL-Yageo-datasheet-118657.pdf?src-supplier=DigiKey, ComponentLink16URL=https://datasheet.octopart.com:443/RC0805FR-0710KL-Yageo-datasheet-118657.pdf?src-supplier=DigiKey, ComponentLink17Description=https://datasheet.octopart.com:443/RC0805FR-0710KL-Yageo-datasheet-502840.pdf?src-supplier=element14, ComponentLink17URL=https://datasheet.octopart.com:443/RC0805FR-0710KL-Yageo-datasheet-502840.pdf?src-supplier=element14, ComponentLink18Description=http://sigma.octopart.com:80/conflict_mineral_statement/Yageo-company-3.pdf?src-supplier=Compliance+Statements, ComponentLink18URL=http://sigma.octopart.com:80/conflict_mineral_statement/Yageo-company-3.pdf?src-supplier=Compliance+Statements, ComponentLink19Description=http://sigma.octopart.com:80/rohs_statement/Yageo-company-2.pdf?src-supplier=Compliance+Statements, ComponentLink19URL=http://sigma.octopart.com:80/rohs_statement/Yageo-company-2.pdf?src-supplier=Compliance+Statements, Composition="Thick Film", Depth=1.25mm, Features="Moisture Resistant", Height=500µm, Lead Free="Lead Free", Length=2mm, Lifecycle Status=Production, Manufacturer Part Number=RC0805FR-0710KL, Military Standard=Not, Mounting Technology="Surface Mount", Number of Terminals=2, Number of Terminations=2, Packaging="Tape and Reel", Pins=2, Power Dissipation=125mW, Power Rating=125mW, Pricing="1=0.12, 10=0.009, 25=0.0088, 50=0.0082, 100=0.0071 (USD)", REACH SVHC=Yes, RoHS=Compliant, Schedule B="8533210045, 8533210045|8533210045|8533210045|8533210045|8533210045|8533210045|8533210045|8533210045|8533210045|8533210045|8533210045|8533210045|8533210045|8533210045|8533210045|8533210045|8533210045|8533210045|8533210045|8533210045|8533210045|8533210045|8533210045|85", Stock=992459, Supplier=DigiKey, Termination=SMD/SMT, Voltage Rating (AC)=150V, Width=1.25mm, Working Voltage=150V
R2 R3 R4: library part RC0805FR-071KL, "Yageo RC0805FR-071KL SMD Resistor 0603 1k Ohm ±1% Thick Film", Case Code (Imperial)=0805, Manufacturer="Yageo Group", Max Operating Temperature=155°C, Max Power Dissipation=125mW, Min Operating Temperature=-55°C, Supplier Part Number=311-1.00KCRDKR-ND, Temperature Coefficient=100ppm/°C, Tolerance=1%, Voltage Rating=150V, Case/Package=0805, Category="Chip SMD Resistors", China RoHS=Non-Compliant, ComponentLink1Description=https://datasheet.octopart.com:443/RC0805FR-071KL-Yageo-datasheet-175887523.pdf?src-supplier=IHS, ComponentLink1URL=https://datasheet.octopart.com:443/RC0805FR-071KL-Yageo-datasheet-175887523.pdf?src-supplier=IHS, ComponentLink2Description=https://datasheet.octopart.com:443/RC0805FR-071KL-Yageo-datasheet-103092701.pdf?src-supplier=Upverter, ComponentLink2URL=https://datasheet.octopart.com:443/RC0805FR-071KL-Yageo-datasheet-103092701.pdf?src-supplier=Upverter, ComponentLink3Description=https://datasheet.octopart.com:443/RC0805FR-071KL-Yageo-datasheet-8330313.pdf?src-supplier=element14+APAC, ComponentLink3URL=https://datasheet.octopart.com:443/RC0805FR-071KL-Yageo-datasheet-8330313.pdf?src-supplier=element14+APAC, ComponentLink4Description=https://datasheet.octopart.com:443/RC0805FR-071KL-Yageo-datasheet-62067350.pdf?src-supplier=element14+APAC, ComponentLink4URL=https://datasheet.octopart.com:443/RC0805FR-071KL-Yageo-datasheet-62067350.pdf?src-supplier=element14+APAC, ComponentLink5Description=https://datasheet.octopart.com:443/RC0805FR-071KL-Yageo-datasheet-12592811.pdf?src-supplier=element14+APAC, ComponentLink5URL=https://datasheet.octopart.com:443/RC0805FR-071KL-Yageo-datasheet-12592811.pdf?src-supplier=element14+APAC, ComponentLink6Description=https://datasheet.octopart.com:443/RC0805FR-071KL-Yageo-Group-datasheet-190305687.pdf?src-supplier=Newark, ComponentLink6URL=https://datasheet.octopart.com:443/RC0805FR-071KL-Yageo-Group-datasheet-190305687.pdf?src-supplier=Newark, ComponentLink7Description=https://datasheet.octopart.com:443/RC0805FR-071KL-Yageo-Group-datasheet-176638170.pdf?src-supplier=Future+Electronics, ComponentLink7URL=https://datasheet.octopart.com:443/RC0805FR-071KL-Yageo-Group-datasheet-176638170.pdf?src-supplier=Future+Electronics, ComponentLink8Description=https://datasheet.octopart.com:443/RC0805FR-071KL-Yageo-datasheet-164759695.pdf?src-supplier=Future+Electronics, ComponentLink8URL=https://datasheet.octopart.com:443/RC0805FR-071KL-Yageo-datasheet-164759695.pdf?src-supplier=Future+Electronics, ComponentLink9Description=https://datasheet.octopart.com:443/RC0805FR-071KL-Yageo-datasheet-8324252.pdf?src-supplier=Future+Electronics, ComponentLink9URL=https://datasheet.octopart.com:443/RC0805FR-071KL-Yageo-datasheet-8324252.pdf?src-supplier=Future+Electronics, ComponentLink10Description=https://datasheet.octopart.com:443/RC0805FR-071KL-Yageo-datasheet-79472498.pdf?src-supplier=Megastar, ComponentLink10URL=https://datasheet.octopart.com:443/RC0805FR-071KL-Yageo-datasheet-79472498.pdf?src-supplier=Megastar, ComponentLink11Description=https://datasheet.octopart.com/RC0805FR-071KL-Yageo-datasheet-73766026.pdf, ComponentLink11URL=https://datasheet.octopart.com/RC0805FR-071KL-Yageo-datasheet-73766026.pdf, ComponentLink12Description=https://datasheet.octopart.com:443/RC0805FR-071KL-Yageo-datasheet-13691069.pdf?src-supplier=Farnell, ComponentLink12URL=https://datasheet.octopart.com:443/RC0805FR-071KL-Yageo-datasheet-13691069.pdf?src-supplier=Farnell, ComponentLink13Description=https://datasheet.octopart.com:443/RC0805FR-071KL-Yageo-datasheet-118657.pdf?src-supplier=DigiKey, ComponentLink13URL=https://datasheet.octopart.com:443/RC0805FR-071KL-Yageo-datasheet-118657.pdf?src-supplier=DigiKey, ComponentLink14Description=https://datasheet.octopart.com:443/RC0805FR-071KL-Yageo-datasheet-502840.pdf?src-supplier=element14, ComponentLink14URL=https://datasheet.octopart.com:443/RC0805FR-071KL-Yageo-datasheet-502840.pdf?src-supplier=element14, ComponentLink15Description=http://sigma.octopart.com:80/conflict_mineral_statement/Yageo-company-3.pdf?src-supplier=Compliance+Statements, ComponentLink15URL=http://sigma.octopart.com:80/conflict_mineral_statement/Yageo-company-3.pdf?src-supplier=Compliance+Statements, ComponentLink16Description=http://sigma.octopart.com:80/rohs_statement/Yageo-company-2.pdf?src-supplier=Compliance+Statements, ComponentLink16URL=http://sigma.octopart.com:80/rohs_statement/Yageo-company-2.pdf?src-supplier=Compliance+Statements, Composition="Thick Film", Depth=1.25mm, Features="Moisture Resistant", Height=500µm, Lead Free="Lead Free", Length=2mm, Lifecycle Status=Production, Manufacturer Part Number=RC0805FR-071KL, Military Standard=Not, Mounting Technology="Surface Mount", Number of Terminals=2, Number of Terminations=2, Packaging="Tape & Reel", Pins=2, Power Dissipation=125mW, Power Rating=125mW, Pricing="1=0.1, 10=0.008, 25=0.0072 (USD)", REACH SVHC=Yes, RoHS=Compliant, Schedule B="8533210045, 8533210045|8533210045, 8533210045|8533210045|8533210045, 8533210045|8533210045|8533210045|8533210045", Stock=1641782, Supplier=DigiKey, Termination=SMD/SMT, Voltage Rating (AC)=150V, Voltage Rating (DC)=150V, Width=1.25mm, Working Voltage=150V